# Altium PCB E77T.PcbDoc
Units mm, origin at the board's own origin, x right, y up, seen from the top; angles counter-clockwise.
Board outline 56 x 42 mm, 2 copper layers (TOP, BOTTOM), stack 1.486 mm thick; 23 components, 31 nets, 108 pads, 118 vias.
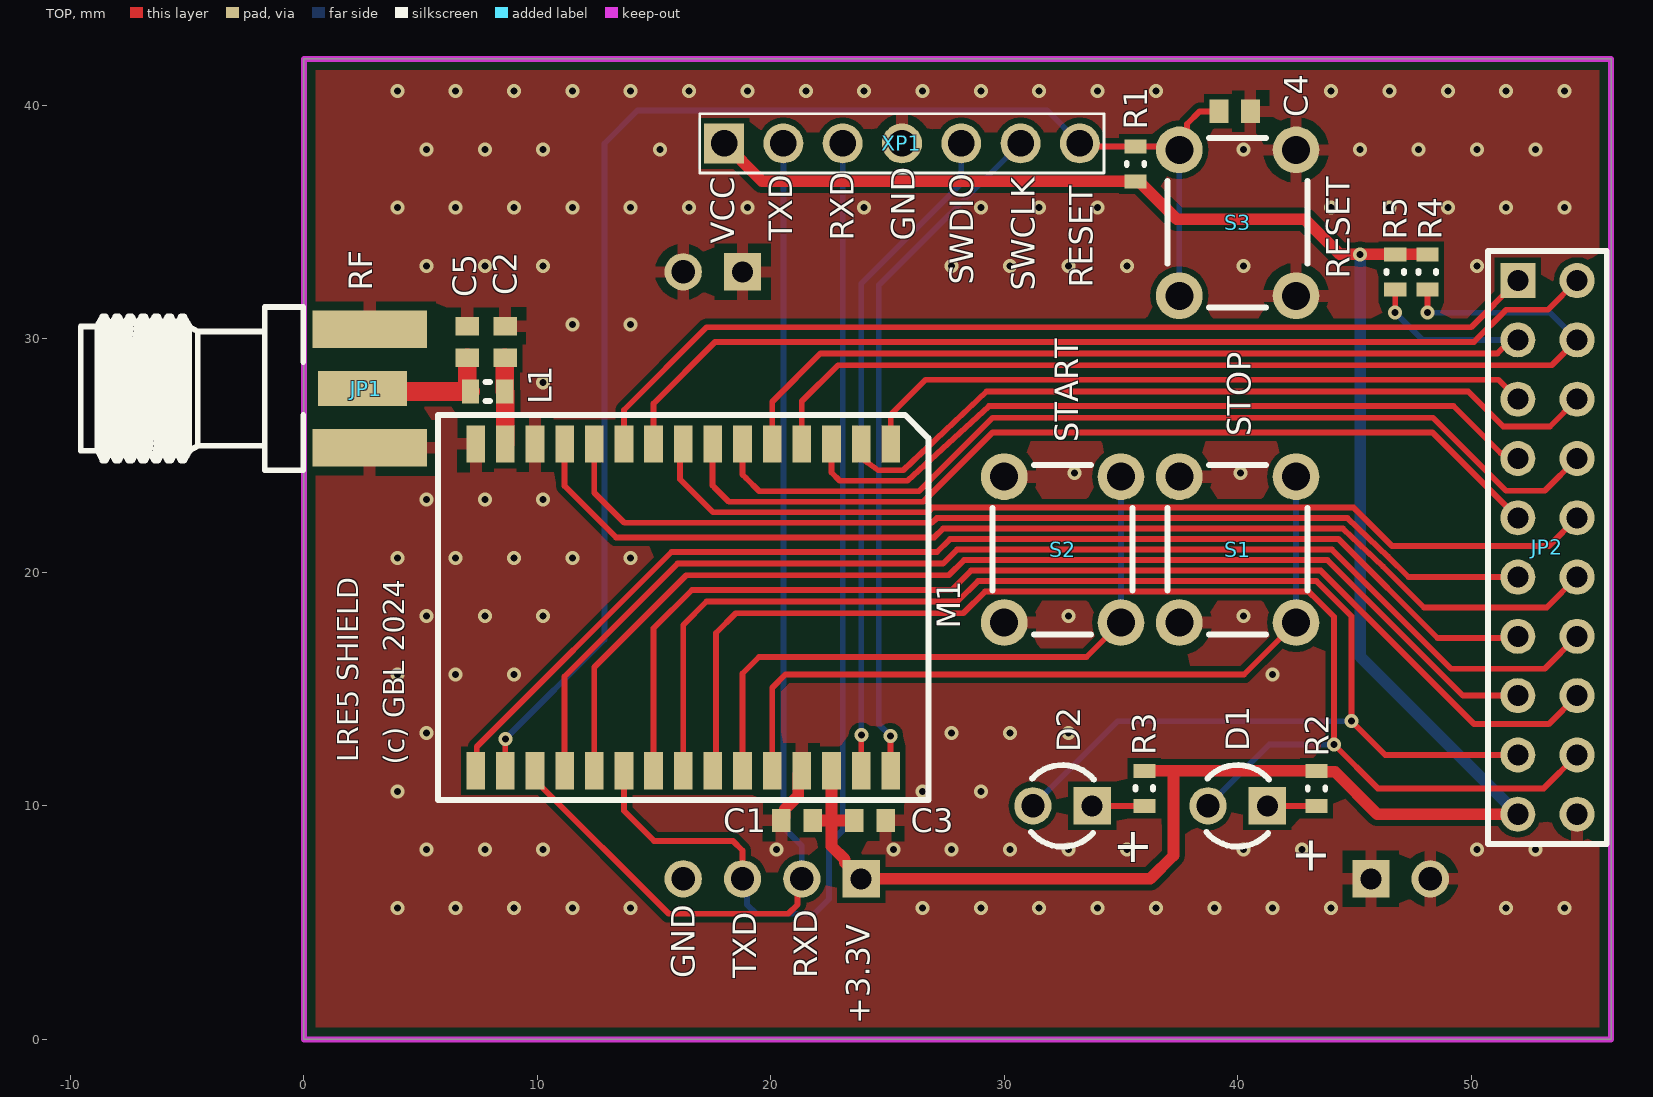
[diagram p0: TOP view]
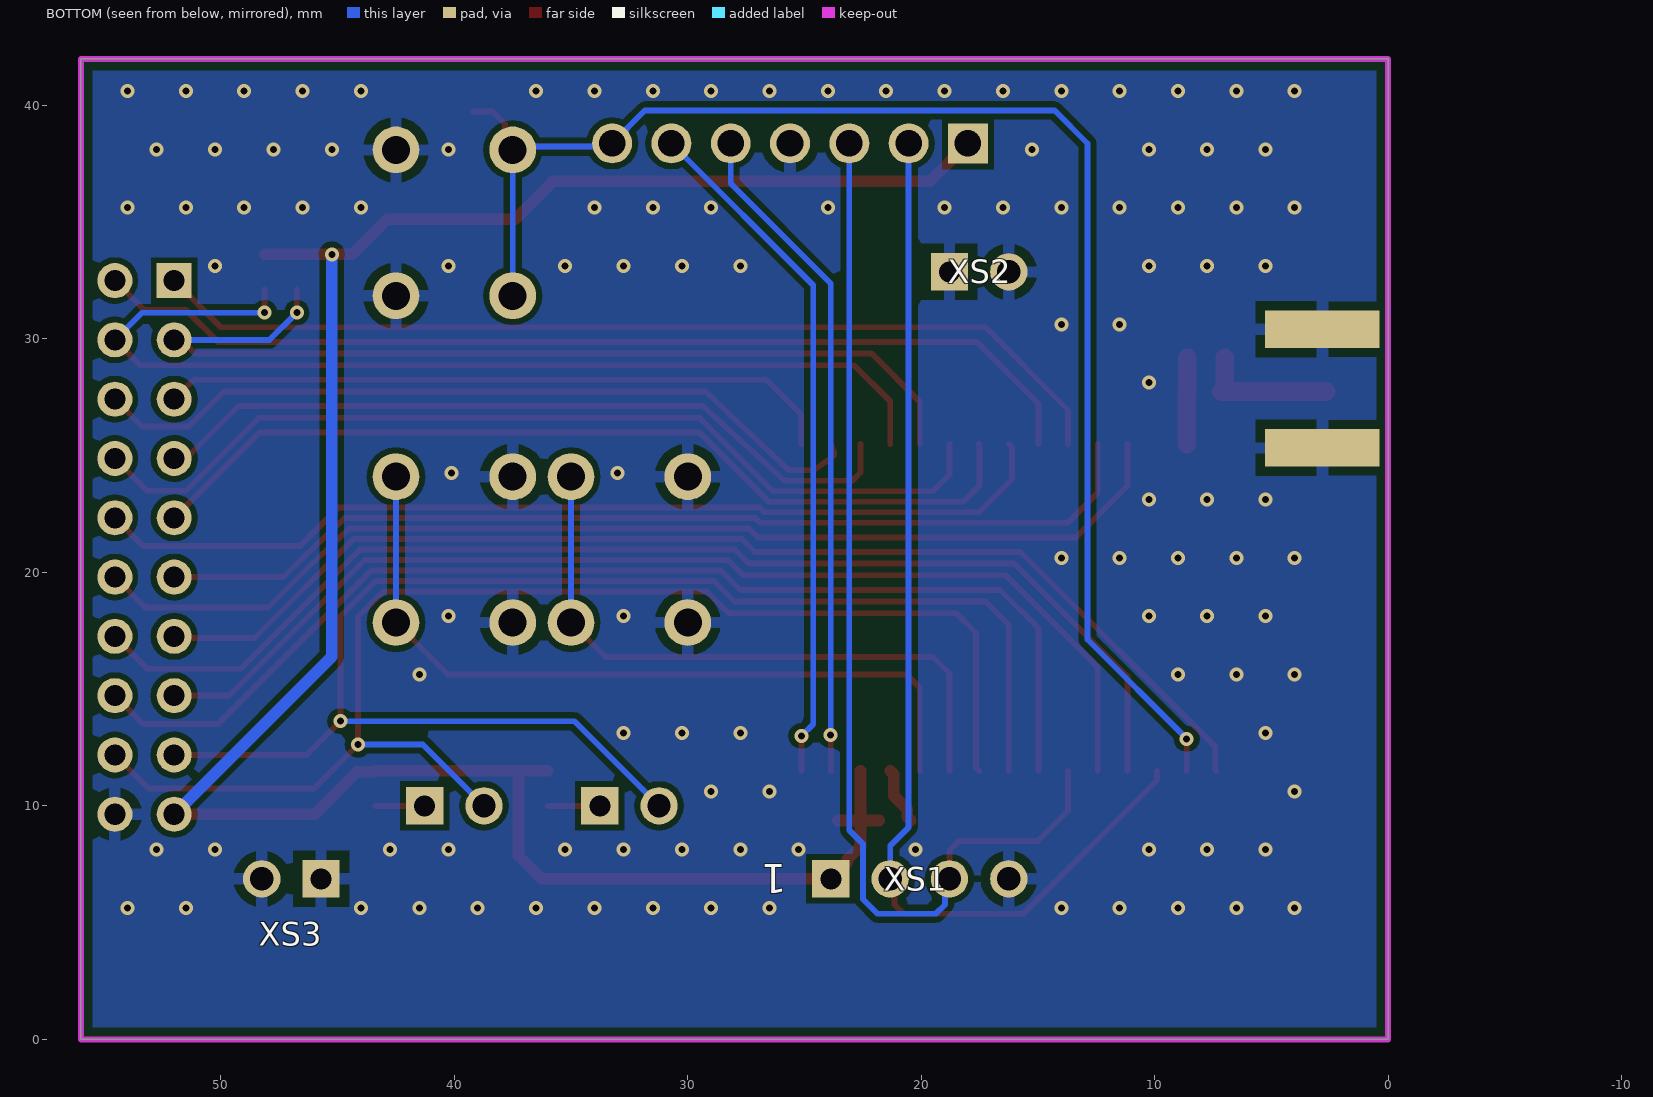
[diagram p1: BOTTOM view, seen from below]
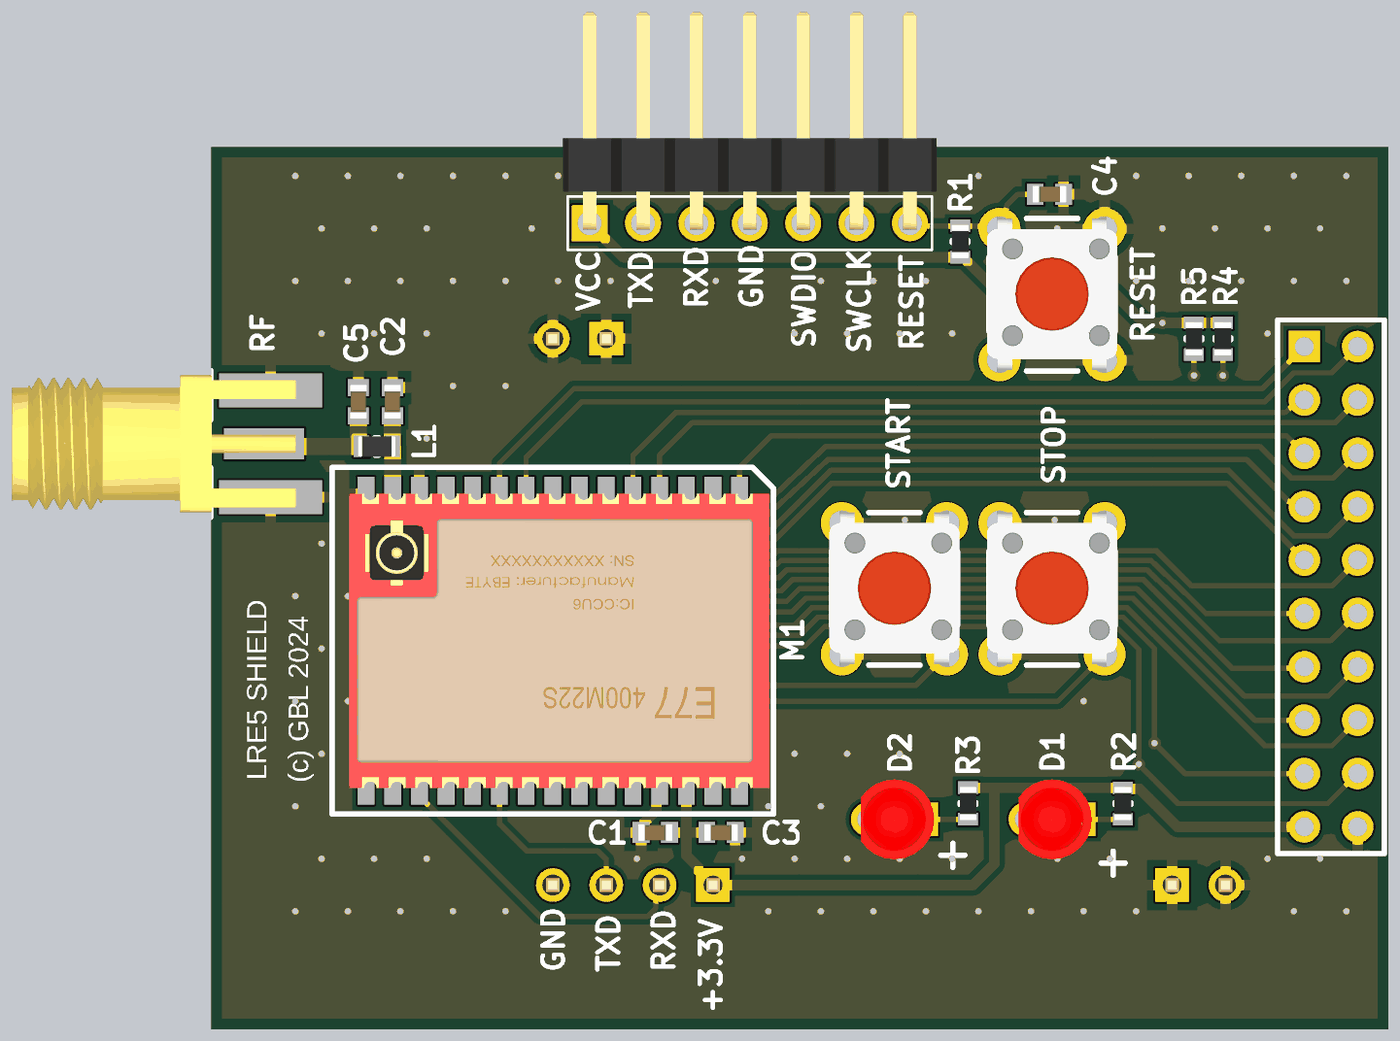
[diagram p2: 3D render of the assembled board from above, using the file's embedded part models]
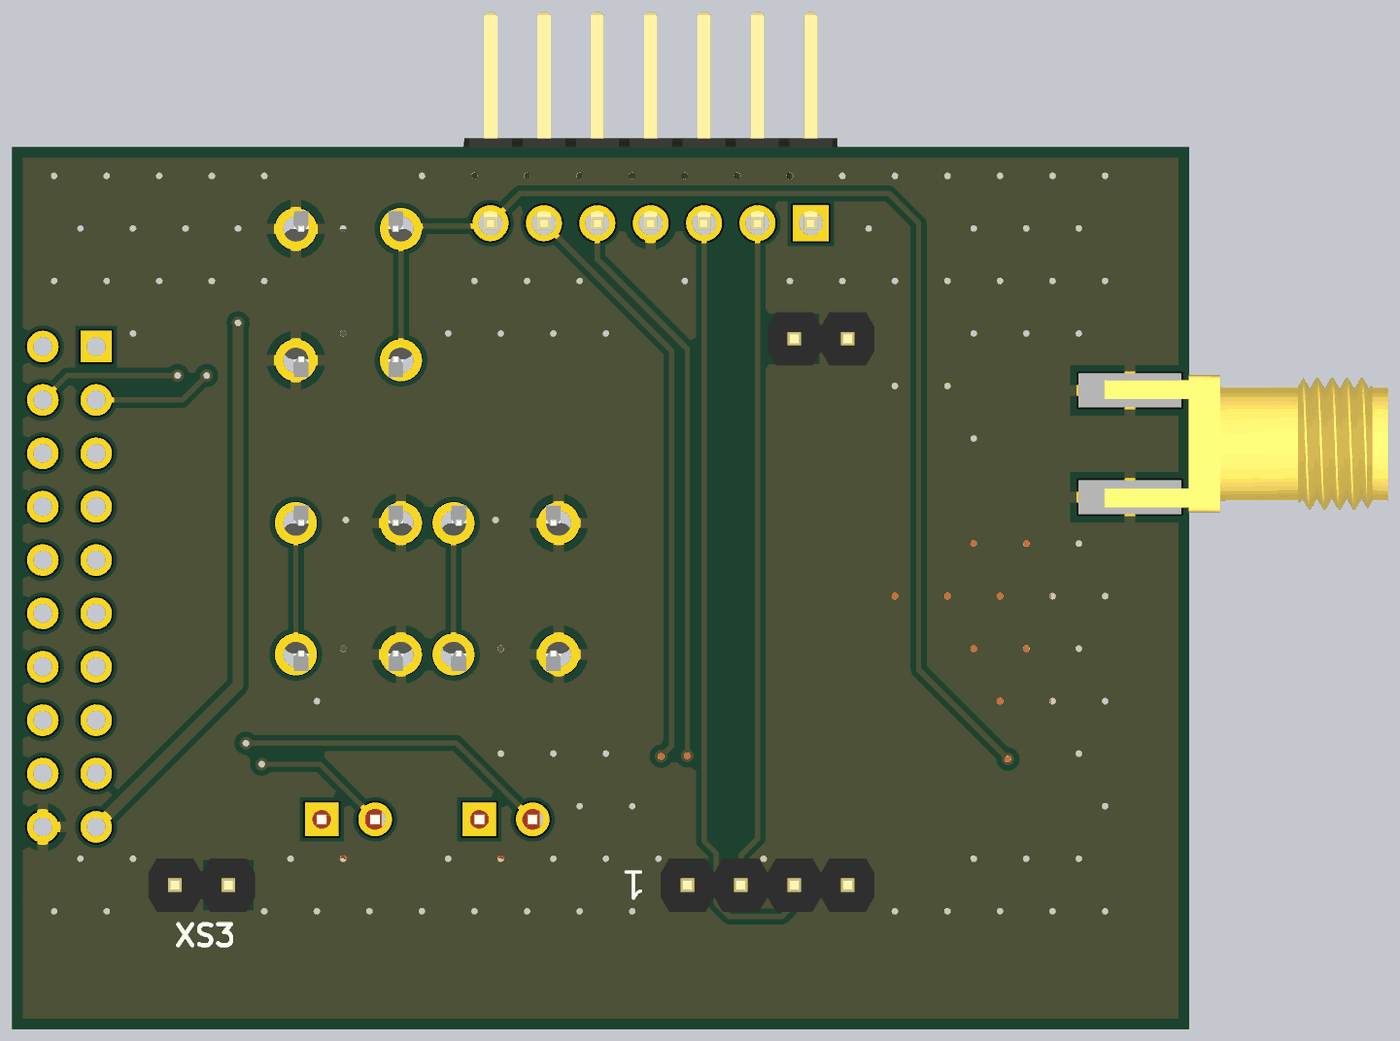
[diagram p3: 3D render of the assembled board from below, using the file's embedded part models]

## Layer stack, top to bottom
Top Solder: solder mask 0.0102, Solder Resist, Dk 3.5
TOP: signal copper 0.018
Dielectric1: core 1.45, FR-4, Dk 4.2
BOTTOM: signal copper 0.018
Bottom Solder: solder mask 0.0102, Solder Resist, Dk 3.5

## Board outline
0,0 56,0 56,42 0,42

## Design rules (kind name [scope] priority, off if disabled: settings)
AssemblyTestPointUsage [All] p1 off:
AssemblyTestpoint [All] p1 off: testpointundercomponent=TRUE minsize=1.016 maxsize=2.54 preferedsize=1.524 minholesize=0 maxholesize=1.016 preferedholesize=0.813 testpointgrid=0.025 usegrid=TRUE gridtolerance=0 allowsidetop=TRUE allowsidebottom=TRUE
BoardOutlineClearance [All] p1: gap=0.5 ignorepadtopadclearanceinfootprint=FALSE
Clearance Clearance_Polygon [InPolygon] p1: gap=0.25 ignorepadtopadclearanceinfootprint=FALSE
Clearance [All] p2: gap=0.2 ignorepadtopadclearanceinfootprint=FALSE
ComponentClearance [All] p1: gap=-5 collisioncheckmode=3 verticalgap=-5 showdistances=TRUE
FabricationTestPointUsage [All] p1 off: valid=0 allowmultiple=FALSE
FabricationTestpoint [All] p1 off: side=3 testpointundercomponent=TRUE minsize=1.016 maxsize=2.54 preferedsize=1.524 minholesize=0 maxholesize=1.016 preferedholesize=0.813 testpointgrid=0.025 allowsidetop=TRUE allowsidebottom=TRUE usegrid=TRUE gridtolerance=0
HoleSize [All] p1: absolutevalues=TRUE maxlimit=8 minlimit=0.025 maxpercent=80.000 minpercent=20.000
HoleToHoleClearance [All] p1: gap=0.25 allowstackedmicrovias=TRUE
MinimumSolderMaskSliver [All] p1: minsoldermaskwidth=0
PlaneClearance [All] p1: clearance=0.5
PlaneConnect [All] p1: planeconnectstyle=Relief reliefexpansion=0.5 reliefentries=4 reliefconductorwidth=0.5 reliefairgap=0.5
PolygonConnect PolygonConnect_1 [All vs (InComponent('C4') AND InComponent('C5'))] p1: thpad.connectstyle=Relief thpad.reliefconductorwidth=0.25 thpad.reliefentries=4 thpad.polygonreliefangle="90 Angle" thpad.airgapwidth=0.25 smdpad.connectstyle=Direct smdpad.reliefconductorwidth=0.254 smdpad.reliefentries=4 smdpad.polygonreliefangle="90 Angle" smdpad.airgapwidth=0.254 via.connectstyle=Direct via.reliefconductorwidth=0.254 via.reliefentries=4 via.polygonreliefangle="90 Angle" via.airgapwidth=0.254
PolygonConnect PolygonConnect_via [isVia] p2: connectstyle=Direct reliefconductorwidth=0.254 reliefentries=4 polygonreliefangle="90 Angle" airgapwidth=0.254
PolygonConnect [All] p3: connectstyle=Relief reliefconductorwidth=0.5 reliefentries=4 polygonreliefangle="90 Angle" airgapwidth=0.4
RoutingCorners [All] p1: cornerstyle=45-Degree minsetback=2.5 maxsetback=2.5
RoutingVias [All] p1: holewidth=0.3 width=0.7 viastyle="Through Hole" minholewidth=0.2 minwidth=0.5 maxholewidth=0.4 maxwidth=0.8
SilkToSilkClearance [All] p1: silktosilkclearance=0
SilkToSolderMaskClearance [IsPad] p1: minsilkscreentomaskgap=-1 clearancetoexposedcopper=TRUE
SolderMaskExpansion [All] p1: expansion=0.1 istentingtop=FALSE
Width [All] p1: maxlimit=2 minlimit=0.15 preferedwidth=0.2 minimp=50.000000 maximp=50.000000 favimp=50.000000
17 further rules are at their usual default settings.

## Components (designator, comment, footprint, x,y, rotation, side; value= is the part's Value field where it differs from the comment)
C1 "1u" C-0603 21.125,9.375 r180 top
C2 "nc" C-0603 8.625,29.875 r90 top
C3 "1n" C-0603 24.25,9.375 r0 top
C4 "100n" C-0603 39.875,39.75 r0 top
C5 "nc" C-0603 7,29.875 r90 top
D1 "LED3mm" LED_3mm_RED 40,10 r180 top value=GREEN
D2 "LED3mm" LED_3mm_RED 32.5,10 r180 top value=RED
JP1 "EM-SA071-GGT" SMA_F_EDGE 1.25,27.875 r0 top
JP2 "Header 10X2" HDR2X10 52,32.5 r270 top locked
L1 "0" L-0603 7.875,27.75 r180 top
M1 "E77-400M22S" E77XX-M22 16.25,18.5 r270 top locked
R1 "1k" R-0603 35.625,37.5 r270 top
R2 "1k" R-0603 43.375,10.75 r90 top
R3 "1k" R-0603 36.003,10.753 r90 top
R4 "10k" R-0603 48.125,32.875 r90 top
R5 "10k" R-0603 46.75,32.875 r90 top
S1 "KLS7-TS3602 -3 15-180" BUTT_MIN 40,21 r90 top locked
S2 "KLS7-TS3602 -3 15-180" BUTT_MIN 32.5,21 r90 top locked
S3 "KLS7-TS3602 -3 15-180" BUTT_MIN 40,35 r90 top locked
XP1 "Header 7" PLS1-7R 18,38.375 r0 top locked
XS1 "PLS4" "PLS4 - 3D" 23.87,6.875 r180 bottom locked value={Value}
XS2 "PLS2" "PLS2 - 3D" 18.79,32.875 r180 bottom locked value={Value}
XS3 "PLS2" "PLS2 - 3D" 45.71,6.875 r0 bottom locked value={Value}

## Footprints (in the part's own frame and the unit in brackets; to place one, negate y for a bottom-side part, rotate by r counter-clockwise, add the part's x,y. Pads: shape width x height; smd on the part's side, far side on the other; paste and mask are expansions set on the pad)
BUTT_MIN [mm]
  round 2 hole 1.2 mask+0.05: 1(-3.15,-2.5) 1(3.1,-2.5) 2(-3.15,2.5) 2(3.1,2.5)
  silkscreen extent -3.66,-3 3.6,3, body extent -3.95,-3.1 3.95,3.1, height 7.01
C-0603 [mm] "Chip Capacitor, 2-Leads, Body 1,60x0,80mm, IPC Medium Density"
  rect 0.8x1 smd: 1(-0.675,0) 2(0.675,0)
  body extent -0.8,-0.4 0.8,0.4, height 0.8
E77XX-M22 [mm]
  rect 1.6x0.8 smd: 1(-7,8.89) 2(-7,7.62) 3(-7,6.35) 4(-7,5.08) 5(-7,3.81) 6(-7,2.54) 7(-7,1.27) 8(-7,0) 9(-7,-1.27) 10(-7,-2.54) 11(-7,-3.81) 12(-7,-5.08) 13(-7,-6.35) 14(-7,-7.62) 15(-7,-8.89) 16(7,-8.89) 17(7,-7.62) 18(7,-6.35) 19(7,-5.08) 20(7,-3.81) 21(7,-2.54) 22(7,-1.27) 23(7,0) 24(7,1.27) 25(7,2.54) 26(7,3.81) 27(7,5.08) 28(7,6.35) 29(7,7.62) 30(7,8.89)
  silkscreen extent -8.25,-10.5 8.25,10.5, body extent -7,-9.68 7,10.3, height 2.7
HDR2X10 [mm] "Connector; Header; 10x2 Position"
  rect 1.5x1.5 hole 0.9: 1(0,0)
  round 1.5 hole 0.9: 2(0,2.54) 3(2.54,0) 4(2.54,2.54) 5(5.08,0) 6(5.08,2.54) 7(7.62,0) 8(7.62,2.54) 9(10.16,0) 10(10.16,2.54) 11(12.7,0) 12(12.7,2.54) 13(15.24,0) 14(15.24,2.54) 15(17.78,0) 16(17.78,2.54) 17(20.32,0) 18(20.32,2.54) 19(22.86,0) 20(22.86,2.54)
  silkscreen extent -1.27,-1.27 24.13,3.81
L-0603 [mm] "Chip Inductor, 2-Leads, Body 1,60x0,80mm, IPC Medium Density"
  rect 0.74x1.02 smd: 1(-0.735,0) 2(0.735,0)
  silkscreen extent -0.1,-0.41 0.1,0.41, body extent -0.9,-0.5 0.9,0.5, height 1
LED_3mm_RED [mm]
  rect 1.6x1.6 hole 0.9: 1(-1.27,0)
  round 1.6 hole 1: 2(1.27,0)
  silkscreen extent -1.34,-1.75 1.34,1.75, body extent -1.9,-1.9 1.6,1.9, height 5.75
PLS1-7R [mm] "Header, Vertical, 2.54 mm pitch; 0.70 mm lead width, 7 pins, 1 row, 7 pins per row, 16.51 mm L X 2.54 mm W X 7.54 mm H body"
  rect 1.71x1.71 hole 1.14 paste-1.71: 1(0,0)
  round 1.71 hole 1.14 paste-1.71: 2(2.54,0) 3(5.08,0) 4(7.62,0) 5(10.16,0) 6(12.7,0) 7(15.24,0)
  silkscreen extent -1.04,-1.27 16.28,1.27, body extent -1.27,-0.32 16.51,10.04, height 2.54
"PLS2 - 3D" [mm]
  rect 1.6x1.6 hole 0.9: 1(0,0)
  round 1.6 hole 1: 2(2.54,0)
  body extent -1.27,-1.27 3.81,1.27, height 8.8
"PLS4 - 3D" [mm]
  rect 1.6x1.6 hole 0.9: 1(0,0)
  round 1.6 hole 1: 2(2.54,0) 3(5.08,0) 4(7.62,0)
  body extent -1.27,-1.27 8.89,1.27, height 8.8
R-0603 [mm] "Chip Resistor, 2-Leads, Body 1,60x0,82mm, IPC Medium Density"
  rect 0.6x0.95 smd: 1(-0.75,0) 2(0.75,0)
  silkscreen extent -0.05,-0.38 0.05,0.38, body extent -0.8,-0.4 0.8,0.4, height 0.45
SMA_F_EDGE [mm] "SMA End Launch Jack for 1.58mm PCB, 50 Ohm, Flat Tab Contact"
  rect 3.81x1.5 smd: 1(1.27,0)
  rect 4.9x1.6 smd: 2(1.575,-2.54) 2(1.575,2.54)
  rect 4.9x1.6 smd far side: 2(1.575,-2.54) 2(1.575,2.54)
  silkscreen extent -10.81,-3.5 -1.28,3.5, body extent -10.73,-3.25 2.77,3.25, height 3.7

## Part data
C1 C2 C3 C4 C5: library part CAPN, Voltage=50V, Вид=Конденсатор, Точність/група=NP0
JP1: library part SMA, "SMA Female R/A PCB Mount", Вид=Роз'єм
JP2: "Header, 10-Pin, Dual row", LatestRevisionDate=17-Jul-2002, LatestRevisionNote="Re-released for DXP Platform.", Publisher="Altium Limited"
L1: library part L, Вид=Індуктивність
R1 R2 R3 R4 R5: library part RES, Вид=Резистор, Точність/група=5%
S1 S2 S3: library part SW-1, Вид=Кнопка
XP1: "Header, 7-Pin", LatestRevisionDate=17-Jul-2002, LatestRevisionNote="Re-released for DXP Platform.", Publisher="Altium Limited"
D1 D2 XS1 XS2 XS3: Mounting  Method=THT

## Via types
v1: diameter 0.6, hole 0.3, TOP to BOTTOM, tented both sides, 118 vias

## Nets (pads, with @x,y where several pads share a name; then routed paths per layer and width w, separated by ;. In a path a pad name is that pad's centre, name@x,y a point inside that pad or via, vN(x,y) a via of type N, cw(c..) or ccw(c..) an arc to the next point about the centre after c; other vN are vias at no path point)
GND: C1.2 C2.2 C3.2 C4.2 C5.2 JP1.2 JP2.20 M1.13 M1.15 M1.27 S1.2 S2.2 S3.1 XP1.4 XS1.4 XS2.1 XS2.2 XS3.1 XS3.2 | length 2.5
  TOP w0.5: C1.2 20.6,9.525 20.6,9.85 21.18,10.43 21.18,11.35 M1.27
  other v1: 4,5.625 6.5,5.625 9,5.625 11.5,5.625 14,5.625 26.5,5.625 29,5.625 31.5,5.625 34,5.625 36.5,5.625 39,5.625 41.5,5.625 44,5.625 51.5,5.625 54,5.625 5.25,8.125 7.75,8.125 10.25,8.125 20.25,8.125 25.25,8.125 27.75,8.125 30.25,8.125 32.75,8.125 35.25,8.125 40.25,8.125 42.75,8.125 50.25,8.125 52.75,8.125 4,10.625 26.5,10.625 29,10.625 5.25,13.125 27.75,13.125 30.25,13.125 32.75,13.125 4,15.625 6.5,15.625 9,15.625 41.5,15.625 5.25,18.125 7.75,18.125 10.25,18.125 32.75,18.125 40.25,18.125 4,20.625 6.5,20.625 9,20.625 11.5,20.625 14,20.625 5.25,23.125 7.75,23.125 10.25,23.125 33,24.25 40.125,24.25 10.25,28.125 11.5,30.625 14,30.625 5.25,33.125 7.75,33.125 10.25,33.125 27.75,33.125 30.25,33.125 32.75,33.125 35.25,33.125 40.25,33.125 50.25,33.125 4,35.625 6.5,35.625 9,35.625 11.5,35.625 14,35.625 16.5,35.625 19,35.625 24,35.625 29,35.625 31.5,35.625 34,35.625 44,35.625 46.5,35.625 49,35.625 51.5,35.625 54,35.625 5.25,38.125 7.75,38.125 10.25,38.125 15.25,38.125 40.25,38.125 45.25,38.125 47.75,38.125 50.25,38.125 52.75,38.125 4,40.625 6.5,40.625 9,40.625 11.5,40.625 14,40.625 16.5,40.625 19,40.625 21.5,40.625 24,40.625 26.5,40.625 29,40.625 31.5,40.625 34,40.625 36.5,40.625 44,40.625 46.5,40.625 49,40.625 51.5,40.625 54,40.625
MISO: JP2.6 M1.2 | length 34
  TOP w0.25: M1.2 23.738,25.171 23.738,25.019 23.885,24.873 24.147,24.7 24.605,24.375 25.675,24.375 29.236,27.75 49.875,27.75 51.375,26.25 53.375,26.25 54.54,27.415 JP2.6
MOSI: JP2.7 M1.3 | length 32.9
  TOP w0.25: M1.3 22.6,24.275 22.95,23.925 25.861,23.925 29.34,27.125 49.25,27.125 51.256,25.119 51.761,25.119 JP2.7
NetC2_1: C2.1 L1.1 M1.14 | length 3.7
  TOP w0.25: L1.1 L1.1@8.63,27.73 ; C2.1@8.61,29.185 C2.1
  TOP w0.8: L1.1 C2.1@8.61,29.185 ; M1.14 L1.1@8.63,27.73
NetC5_1: C5.1 JP1.1 L1.2 | length 6.2
  TOP w0.25: JP1.1 JP1.1@2.645,27.75 ; L1.2@7,27.89 L1.2
  TOP w0.8: JP1.1@2.645,27.75 L1.2 ; L1.2@7,27.89 C5.1
NetD1_1: D1.1 R2.1 | length 2.1
  TOP w0.25: D1.1 R2.1
NetD2_1: D2.1 R3.1 | length 2.2
  TOP w0.25: D2.1 36,10 R3.1
NRST: C4.1 M1.17 R1.1 S3.2 XP1.7 | length 68
  TOP w0.25: M1.17 v1(8.629,12.871) ; XP1.7 33.377,38.237 37.363,38.237 37.5,38.1 37.832,38.432 37.832,39.207 38.375,39.75 C4.1
  BOTTOM w0.25: v1(8.629,12.871) 8.629,12.879 12.875,17.125 12.875,38.375 14.292,39.792 31.833,39.792 33.24,38.385 XP1.7 33.377,38.237 37.363,38.237 37.5,38.1 S3.2@37.5,31.85
PA0: JP2.9 M1.7 | length 39.3
  TOP w0.25: M1.7 17.5,25.48 17.5,23.729 17.646,23.582 18.204,23.025 26.536,23.025 29.511,26 48.34,26 JP2.9
PA1: JP2.10 M1.8 | length 41.9
  TOP w0.25: M1.8 16.111,25.361 16.111,23.989 16.257,23.842 17.525,22.575 26.723,22.575 26.923,22.775 44.975,22.775 46.625,21.125 53.325,21.125 JP2.10
PA4: JP2.11 M1.11 | length 43.3
  TOP w0.25: M1.11 12.44,23.414 13.729,22.125 26.909,22.125 27.109,22.325 44.702,22.325 46.439,20.675 47.314,19.8 JP2.11
PA5: JP2.12 M1.12 | length 48.1
  TOP w0.25: M1.12 11.17,23.705 13.375,21.5 27,21.5 27.375,21.875 44.515,21.875 46.224,20.253 47.977,18.5 53.24,18.5 JP2.12
PA8: JP2.13 M1.16 | length 51.1
  TOP w0.25: M1.16 7.404,11.544 7.404,12.529 15.75,20.875 27.125,20.875 27.675,21.425 44.325,21.425 48.561,17.189 51.929,17.189 JP2.13
PA11: JP2.15 M1.20 | length 48.3
  TOP w0.25: M1.20 12.44,15.94 16.375,19.875 27.625,19.875 28.275,20.525 43.85,20.525 49.655,14.72 JP2.15
PA12: JP2.14 M1.19 | length 52.4
  TOP w0.25: M1.19 11.17,15.545 16,20.375 27.375,20.375 27.975,20.975 44.036,20.975 49.136,15.875 53.155,15.875 JP2.14
PA15: M1.25 S2.1 | length 27.5
  TOP w0.25: M1.25 18.79,15.665 19.5,16.375 33.525,16.375 S2.1@35,17.85
  BOTTOM w0.25: S2.1@35,17.85 S2.1@35,24.1
PB0: D1.2 JP2.18 M1.24 | length 57.4
  TOP w0.25: M1.24 17.654,11.634 17.654,17.404 18.5,18.25 28.25,18.25 29.175,19.175 43.049,19.175 43.437,18.787 44.125,18.099 v1(44.125,12.625) 46,10.75 53.11,10.75 JP2.18
  BOTTOM w0.25: D1.2 41.355,12.625 v1(44.125,12.625) ; JP2.18@54.54,12.165 JP2.18
PB2: D2.2 JP2.17 M1.23 | length 63.6
  TOP w0.25: M1.23 16.25,17.75 17.25,18.75 28,18.75 28.875,19.625 43.375,19.625 44.875,18.125 v1(44.875,13.625) 46.32,12.18 JP2.17
  BOTTOM w0.25: D2.2 34.855,13.625 v1(44.875,13.625)
PB8: JP2.8 M1.6 | length 40.5
  TOP w0.25: M1.6 18.79,24.189 18.936,24.042 19.504,23.475 26.35,23.475 29.5,26.625 48.367,26.625 51.492,23.5 53.16,23.5 JP2.8
PB12: JP2.16 M1.22 | length 49.9
  TOP w0.25: M1.22 14.98,17.605 16.625,19.25 27.75,19.25 28.575,20.075 43.561,20.075 50.136,13.5 53.32,13.5 JP2.16
PC13: M1.26 S1.1 | length 33.4
  TOP w0.25: M1.26 20.06,15.06 20.625,15.625 40.275,15.625 S1.1@42.5,17.85
  BOTTOM w0.25: S1.1@42.5,17.85 S1.1@42.5,24.1
RXD: M1.21 XP1.3 XS1.3 | length 46.4
  TOP w0.25: M1.21 13.71,9.79 15,8.5 18.375,8.5 18.79,8.085 XS1.3
  BOTTOM w0.25: XS1.3 18.975,6.69 18.975,5.775 19.375,5.375 21.87,5.375 22.5,6.005 22.5,8.375 23.08,8.955 XP1.3
RXD1: JP2.1 M1.10 | length 42
  TOP w0.25: M1.10 13.71,26.96 17.25,30.5 50,30.5 JP2.1
SCK: JP2.5 M1.1 | length 29.1
  TOP w0.25: M1.1 25.14,26.765 26.625,28.25 51.17,28.25 JP2.5
SCL: JP2.4 M1.4 R4.1 | length 44
  TOP w0.25: M1.4 21.33,27.33 22.875,28.875 53.455,28.875 JP2.4 ; v1(48.125,31.125) R4.1
  BOTTOM w0.25: v1(48.125,31.125) 53.375,31.125 JP2.4
SDA: JP2.3 M1.5 R5.1 | length 41.6
  TOP w0.25: M1.5 20.06,27.31 22.125,29.375 51.125,29.375 51.71,29.96 JP2.3 ; v1(46.75,31.125) R5.1
  BOTTOM w0.25: v1(46.75,31.125) 47.915,29.96 JP2.3
SWCLK: M1.30 XP1.6 | length 29.6
  TOP w0.25: v1(25.125,13) 25.125,11.515 M1.30
  BOTTOM w0.25: v1(25.125,13) 24.625,13.5 24.625,32.3 XP1.6
SWDIO: M1.29 XP1.5 | length 28.7
  TOP w0.25: M1.29 23.879,11.509 v1(23.879,13.025)
  BOTTOM w0.25: v1(23.879,13.025) 23.875,13.029 23.875,32.375 28.16,36.66 XP1.5
TXD: M1.18 XP1.2 XS1.2 | length 47.2
  TOP w0.25: M1.18 9.9,11.1 15.625,5.375 20.75,5.375 21.15,5.775 21.15,6.695 XS1.2
  BOTTOM w0.25: XP1.2 20.54,9.085 21.33,8.295 XS1.2
TXD1: JP2.2 M1.9 | length 43.5
  TOP w0.25: M1.9 14.98,27.23 17.625,29.875 50.125,29.875 51.5,31.25 53.29,31.25 JP2.2
VCC: C1.1 C3.1 JP2.19 M1.28 R1.2 R2.2 R3.2 R4.2 R5.2 XP1.1 XS1.1 | length 100
  TOP w0.5: XP1.1 19.625,36.75 35.8,36.75 35.85,36.7 35.85,36.668 37.393,35.125 42.875,35.125 44.375,33.625 v1(45.25,33.625) R5.2 R4.2 ; C1.1 22.6,9.375 ; M1.28 22.6,9.375 ; C3.1 22.6,9.375 ; R3.2 37.25,11.503 ; JP2.19 45.985,9.64 44.168,11.457 43.418,11.457 R2.2 43.372,11.503 37.25,11.503 ; 22.6,9.375 22.6,8.275 23.17,7.705 23.17,7.575 XS1.1 36.25,6.875 37.25,7.875 37.25,11.503
  BOTTOM w0.5: v1(45.25,33.625) 45.25,16.39 JP2.19

## Polygon pours and split planes (outlines as drawn)
GND on TOP "gnd_top" (solid, remove dead copper, pour order 0): 67,41.5 67,0 0.5,0 0.5,41.5
GND on BOTTOM "gnd_bott" (solid, remove dead copper, pour order 2): 0,42 0,0 67,0 67,42

## Keep-outs
Keep-Out Layer:
  the board outline again, w0.254

## Silkscreen, mask and mechanical layers (free items; w line width, h text height)
Top Overlay:
  text "TXD" at 20.925,34.2 h1 r90
  text "RXD" at 23.55,34.2 h1 r90
  text "GND" at 26.175,34.2 h1 r90
  text "VCC" at 18.425,34.075 h1 r90
  text "RESET" at 44.8,32.575 h1 r90
  text "SWDIO" at 28.675,32.325 h1 r90
  text "RESET" at 33.8,32.2 h1 r90
  text "RF" at 2.925,32.075 h1 r90
  text "SWCLK" at 31.3,32.075 h1 r90
  text "STOP" at 40.55,25.825 h1 r90
  text "START" at 33.175,25.575 h1 r90
  text "LRE5 SHIELD" at 2.625,11.875 h1.52 r90
  text "(c) GBL 2024" at 4.604,11.75 h1.52 r90
  text "GND" at 16.75,2.625 h1 r90
  text "TXD" at 19.375,2.625 h1 r90
  text "RXD" at 22,2.625 h1 r90
  text "+3.3V" at 24.25,0.65 h1 r90
Board:
  the board outline again, w0.25

## Text inside footprints (layer, text, board x,y; h text height)
D1: Top Overlay "+" at 44,8.5 h1.5 r180
D2: Top Overlay "+" at 36.375,8.875 h1.5 r180
XS1: Bottom Overlay "1" at 25.75,7.5 h1.25 r180